# EAGLE board temp_board (EAGLE 9.6.2)
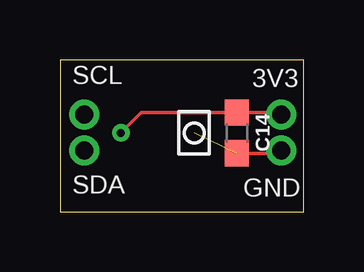
[diagram p0: board, top side]
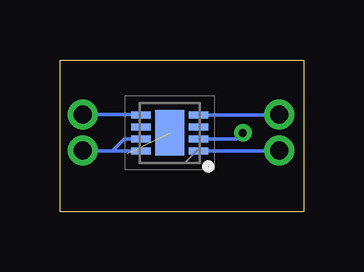
[diagram p1: board, bottom side, seen from below]

Size 10.16 x 6.35 mm. Coordinates in mm from the lower left corner, seen from the top.
Outline: 0,0 10.16,0 10.16,6.35 0,6.35 0,0
Copper layers (1*16): Top 0.035mm / dielectric 1.6mm / Bottom 0.035mm
Design rules "custom_jlcpcb_2layer": minimum track width 5mil, minimum drill 12mil, track to track 5mil, track to pad 5mil, pad to pad 5mil, via to via 20mil, smd to smd 0mil, copper to edge 0.3mm, drill to drill 0.5mm, minimum pad ring 8mil, minimum via ring 8mil, stop-mask expansion 0mil, vias tented up to drill 100mil, thermal gap 10mil

## Footprints (pad centres in the part's own frame; a part is rotated, then mirrored left to right if it is on the bottom)
0603 = smd 1.1 x 1: 1 -0.85,0; 2 0.85,0
1X02_1.5MM_NO_SILK = drill 0.75 pad 1.25: 1 1.5,0; 2 0,0
SON50P250X250X100-9N = smd 0.8 x 0.3: 1 -1.2,0.75; 2 -1.2,0.25; 3 -1.2,-0.25; 4 -1.2,-0.75; 5 1.2,-0.75; 6 1.2,-0.25; 7 1.2,0.25; 8 1.2,0.75 | smd 1.2 x 1.9: 9 0,0

## Placement (x,y rotation side)
C14  0.1uF  [0603]  7.37,3.3 270 top
J1  [1X02_1.5MM_NO_SILK]  9.22,4.06 270 top
J2  [1X02_1.5MM_NO_SILK]  1.02,4.06 270 top
U8  STS35-DIS  [SON50P250X250X100-9N]  5.59,3.3 180 bottom

## Library data of the parts
C14 = SparkFun-Capacitors; PROD_ID: CAP-08604
J1 J2 = SparkFun-Connectors
U8 = STS35-DIS; DESCRIPTION: Board Mount Temperature Sensors High-accuracy Digital Temperature Sensor IC; HEIGHT: 1mm; MANUFACTURER_NAME: Sensirion; MANUFACTURER_PART_NUMBER: STS35-DIS; MOUSER_PART_NUMBER: 403-STS35-DIS; MOUSER_PRICE-STOCK: https://www.mouser.co.uk/ProductDetail/Sensirion/STS35-DIS?qs=F5EMLAvA7IBgq10iVaCNnw%3D%3D

## Nets
3.3V: C14.1 J1.2 U8.2 U8.5
GND: C14.2 J1.1 U8.7 U8.8 U8.9
SCL: J2.2 U8.4
SDA: J2.1 U8.1

## Tracks (layer width: path | path; a pad name or v marks a point on that pad's centre or on a via)
3.3V  (via drill 0.33 pad 0.66)
  Top 0.152: 9.26,4.08 J1.2 9.18,4.15 C14.1 3.39,4.15 v2.54,3.3
  Bottom 0.152: U8.2 2.79,3.05 v2.54,3.3 | U8.5 6.8,4.06 J1.2
GND  (1 unrouted)
  Top 0.152: C14.2 9.16,2.45 J1.1
  Bottom 0.152: U8.8 7.99,2.55 | 7.99,2.55 9.26,2.55 J1.1 | U8.7 7.49,3.05 7.99,2.55
SCL
  Bottom 0.152: U8.4 J2.2
SDA
  Bottom 0.152: U8.1 J2.1

## Text on the board
tPlace: SCL | 3V3 | SDA | GND